# EAGLE board RC2014 Led Monitor using TIL311 (EAGLE 7.1.0)
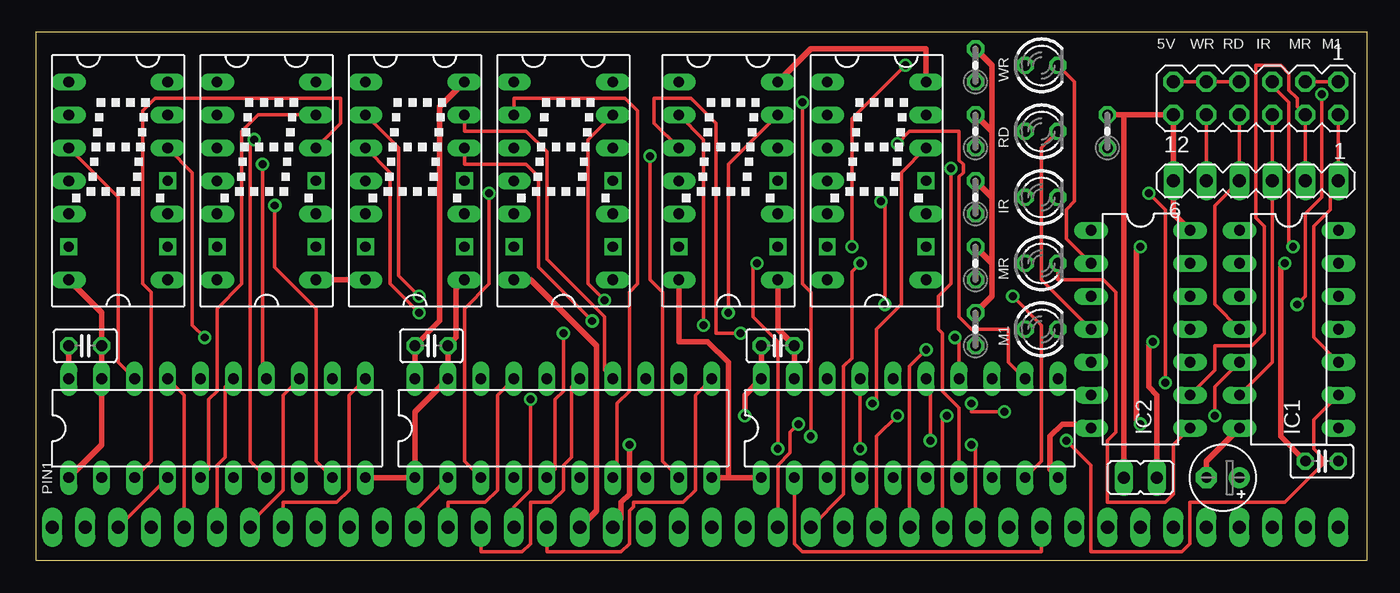
[diagram p0: board, top side]
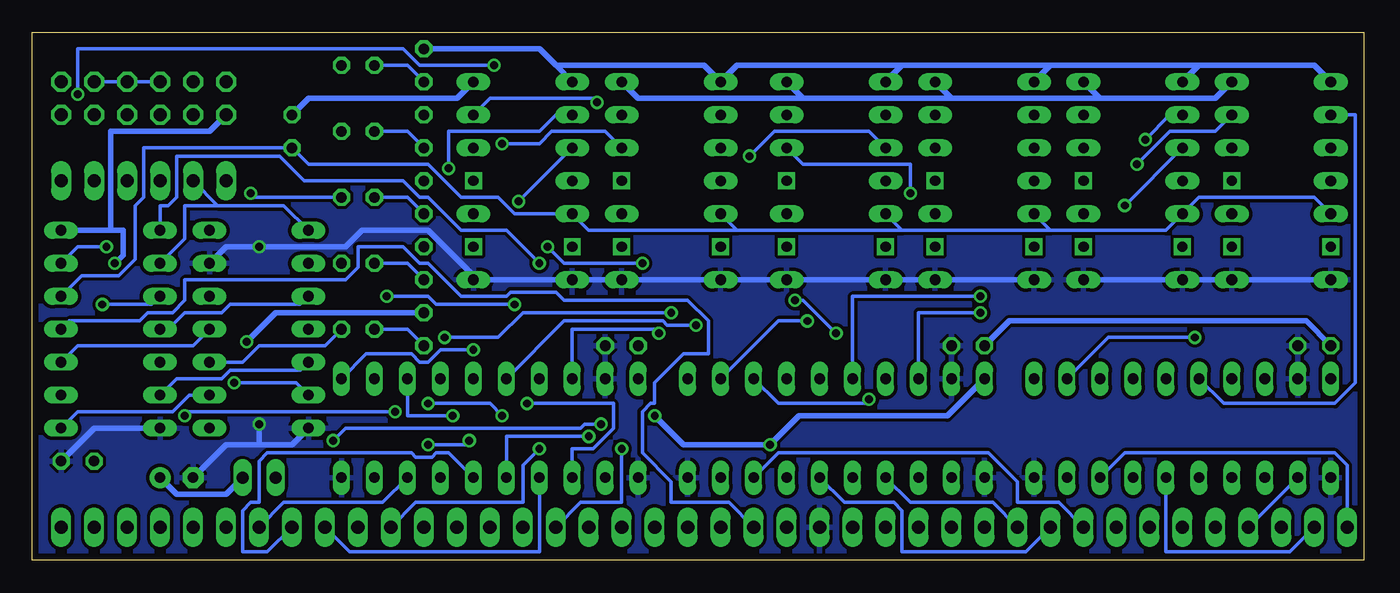
[diagram p1: board, bottom side, seen from below]

Size 102.54 x 40.63 mm. Coordinates in mm from the lower left corner, seen from the top.
Outline: 0,0 102.54,0 102.54,40.63 0,40.63 0,0
Copper layers (1*16): Top 0.035mm / dielectric 1.5mm / Bottom 0.035mm
Design rules "default *": minimum track width 10mil, minimum drill 24mil, track to track 10mil, track to pad 10mil, pad to pad 10mil, via to via 10mil, smd to smd 8mil, copper to edge 20mil, drill to drill 8mil, minimum pad ring 10mil, minimum via ring 8mil, stop-mask expansion 4mil, vias tented up to drill 25mil, thermal gap 10mil
Net classes: 1 PWR: width 0.406 mm

## Footprints (pad centres in the part's own frame; a part is rotated, then mirrored left to right if it is on the bottom)
C025-025X050 = drill 0.813 octagon: 1 -1.27,0; 2 1.27,0
E2,5-5 = drill 0.813 pad 1.6: + -1.27,0 | drill 0.813 pad 1.6 octagon: - 1.27,0
HTIL311A_EXTRAPADS = drill 0.813 long: 1 -3.81,7.62; 2 -3.81,5.08; 3 -3.81,2.54; 4 -3.81,0; 5 -3.81,-2.54; 7 -3.81,-7.62; 8 3.81,-7.62; 10 3.81,-2.54; 12 3.81,2.54; 13 3.81,5.08; 14 3.81,7.62 | drill 0.8 square: UNUSED1 3.81,0; UNUSED2 -3.81,-5.08; UNUSED3 3.81,-5.08
DIL14 = drill 0.813 long: 1 -7.62,-3.81; 2 -5.08,-3.81; 3 -2.54,-3.81; 4 0,-3.81; 5 2.54,-3.81; 6 5.08,-3.81; 7 7.62,-3.81; 8 7.62,3.81; 9 5.08,3.81; 10 2.54,3.81; 11 0,3.81; 12 -2.54,3.81; 13 -5.08,3.81; 14 -7.62,3.81
DIL20 = drill 0.813 long: 1 -11.43,-3.81; 2 -8.89,-3.81; 3 -6.35,-3.81; 4 -3.81,-3.81; 5 -1.27,-3.81; 6 1.27,-3.81; 7 3.81,-3.81; 8 6.35,-3.81; 9 8.89,-3.81; 10 11.43,-3.81; 11 11.43,3.81; 12 8.89,3.81; 13 6.35,3.81; 14 3.81,3.81; 15 1.27,3.81; 16 -1.27,3.81; 17 -3.81,3.81; 18 -6.35,3.81; 19 -8.89,3.81; 20 -11.43,3.81
JP1 = drill 0.914 long: 1 0,-1.27; 2 0,1.27
LED3MM = drill 0.813 octagon: A -1.27,0; K 1.27,0
0204V = drill 0.813 octagon: 1 -1.27,0; 2 1.27,0
MA06-2 = drill 1.016 octagon: 1 -6.35,-1.27; 2 -6.35,1.27; 3 -3.81,-1.27; 4 -3.81,1.27; 5 -1.27,-1.27; 6 -1.27,1.27; 7 1.27,-1.27; 8 1.27,1.27; 9 3.81,-1.27; 10 3.81,1.27; 11 6.35,-1.27; 12 6.35,1.27
MA06-1 = drill 1.016 long: 1 -6.35,0; 2 -3.81,0; 3 -1.27,0; 4 1.27,0; 5 3.81,0; 6 6.35,0
SIP40 = drill 1.016 long: 1 -48.26,0; 2 -45.72,0; 3 -43.18,0; 4 -40.64,0; 5 -38.1,0; 6 -35.56,0; 7 -33.02,0; 8 -30.48,0; 9 -27.94,0; 10 -25.4,0; 11 -22.86,0; 12 -20.32,0; 13 -17.78,0; 14 -15.24,0; 15 -12.7,0; 16 -10.16,0; 17 -7.62,0; 18 -5.08,0; 19 -2.54,0; 20 0,0; 21 2.54,0; 22 5.08,0; 23 7.62,0; 24 10.16,0; 25 12.7,0; 26 15.24,0; 27 17.78,0; 28 20.32,0; 29 22.86,0; 30 25.4,0; 31 27.94,0; 32 30.48,0; 33 33.02,0; 34 35.56,0; 35 38.1,0; 36 40.64,0; 37 43.18,0; 38 45.72,0; 39 48.26,0; 40 50.8,0

## Placement (x,y rotation side)
C1  [C025-025X050]  30.48,16.51 0 top
C3  [C025-025X050]  57.15,16.51 0 top
C5  [C025-025X050]  99.06,7.62 0 top
C7  [C025-025X050]  3.81,16.51 0 top
C8  [E2,5-5]  91.44,6.35 180 top
DIS1  HTIL311A_EXTRAPADS  [HTIL311A_EXTRAPADS]  6.35,29.21 0 top
DIS2  HTIL311A_EXTRAPADS  [HTIL311A_EXTRAPADS]  17.78,29.21 0 top
DIS3  HTIL311A_EXTRAPADS  [HTIL311A_EXTRAPADS]  29.21,29.21 0 top
DIS4  HTIL311A_EXTRAPADS  [HTIL311A_EXTRAPADS]  40.64,29.21 0 top
DIS5  HTIL311A_EXTRAPADS  [HTIL311A_EXTRAPADS]  53.34,29.21 0 top
DIS6  HTIL311A_EXTRAPADS  [HTIL311A_EXTRAPADS]  64.77,29.21 0 top
IC1  74HCT04N  [DIL14]  96.52,17.78 270 top
IC2  74LS05N  [DIL14]  85.09,17.78 270 top
IC6  74HCT244N  [DIL20]  13.97,10.16 0 top
IC7  74HCT244N  [DIL20]  40.64,10.16 0 top
IC8  74HCT244N  [DIL20]  67.31,10.16 0 top
JP1  [JP1]  85.09,6.35 270 top
LED1  [LED3MM]  77.47,38.1 0 top
LED2  [LED3MM]  77.47,33.02 0 top
LED3  [LED3MM]  77.47,27.94 0 top
LED4  [LED3MM]  77.47,22.86 0 top
LED5  [LED3MM]  77.47,17.78 0 top
R1  [0204V]  72.39,38.1 90 top
R2  [0204V]  72.39,33.02 90 top
R3  [0204V]  72.39,27.94 90 top
R4  [0204V]  72.39,22.86 90 top
R5  [0204V]  72.39,17.78 90 top
R6  [0204V]  82.55,33.02 90 top
SV1  [MA06-2]  93.98,35.56 180 top
SV2  [MA06-1]  93.98,29.21 180 top
U$1  RC2014  [SIP40]  49.53,2.54 0 top

## Library data of the parts
C1 C3 C5 C7 C8 R1-R6 = resistor
DIS1-DIS6 = scott; OC_FARNELL: unknown; OC_NEWARK: unknown
IC1 IC2 IC6-IC8 = 74xx-eu
JP1 = jumper
LED1-LED5 = led
SV1 SV2 = con-lstb; OC_FARNELL: unknown; OC_NEWARK: unknown
U$1 = scott

## Nets
+5V [PWR]: C1.1 C3.1 C5.1 C7.1 DIS1.14 DIS2.14 DIS3.14 DIS4.14 DIS5.14 DIS6.14 IC1.14 IC2.14 IC6.20 IC7.20 IC8.20 JP1.1 R6.2 SV1.12 SV2.6 U$1.18
A0: IC7.11 U$1.16
A1: IC7.13 U$1.15
A2: IC7.15 U$1.14
A3: IC7.17 U$1.13
A4: IC7.2 U$1.12
A5: IC7.4 U$1.11
A6: IC7.6 U$1.10
A7: IC7.8 U$1.9
A8: IC6.11 U$1.8
A9: IC6.13 U$1.7
A10: IC6.15 U$1.6
A11: IC6.17 U$1.5
A12: IC6.2 U$1.4
A13: IC6.4 U$1.3
A14: IC6.6 U$1.2
A15: IC6.8 U$1.1
D0: IC8.11 U$1.27
D1: IC8.13 U$1.28
D2: IC8.15 U$1.29
D3: IC8.17 U$1.30
D4: IC8.2 U$1.31
D5: IC8.4 U$1.32
D6: IC8.6 U$1.33
D7: IC8.8 U$1.34
GND [PWR]: C1.2 C3.2 C5.2 C7.2 C8.- DIS1.7 DIS1.8 DIS2.7 DIS2.8 DIS3.7 DIS3.8 DIS4.7 DIS4.8 DIS5.7 DIS5.8 DIS6.7 DIS6.8 IC1.7 IC2.7 IC2.13 IC6.1 IC6.10 IC6.19 IC7.1 IC7.10 IC7.19 IC8.1 IC8.10 IC8.19 U$1.17
IORQ: IC1.5 U$1.26
IORQ_INV: IC1.6 IC2.5 SV1.6 SV2.3
IORQ_LED: IC2.6 LED3.K
LATCH: DIS1.5 DIS2.5 DIS3.5 DIS4.5 DIS5.5 DIS6.5 IC1.12 R6.1
M1: IC1.11 U$1.19
M1_INV: IC1.10 IC2.11 SV1.2 SV2.1
M1_LED: IC2.10 LED5.K
MREQ: IC1.9 U$1.23
MREQ_INV: IC1.8 IC2.9 SV1.4 SV2.2
MREQ_LED: IC2.8 LED4.K
N$1: DIS1.3 IC6.18
N$2 [PWR]: C8.+ DIS1.1 DIS2.1 DIS3.1 DIS4.1 DIS5.1 DIS6.1 JP1.2 R1.2 R2.2 R3.2 R4.2 R5.2
N$3: LED1.A R1.1
N$4: LED2.A R2.1
N$5: LED3.A R3.1
N$6: LED4.A R4.1
N$7: LED5.A R5.1
N$8: DIS1.2 IC6.16
N$9: DIS1.13 IC6.14
N$10: DIS1.12 IC6.12
N$11: DIS2.3 IC6.9
N$12: DIS2.2 IC6.7
N$13: DIS2.13 IC6.5
N$14: DIS2.12 IC6.3
N$15: DIS3.3 IC7.18
N$16: DIS3.2 IC7.16
N$17: DIS3.13 IC7.14
N$18: DIS3.12 IC7.12
N$19: DIS4.3 IC7.9
N$20: DIS4.2 IC7.7
N$21: DIS4.13 IC7.5
N$22: DIS4.12 IC7.3
N$23: DIS5.3 IC8.18
N$24: DIS5.2 IC8.16
N$25: DIS5.13 IC8.14
N$26: DIS5.12 IC8.12
N$27: DIS6.3 IC8.9
N$28: DIS6.2 IC8.7
N$29: DIS6.13 IC8.5
N$30: DIS6.12 IC8.3
N$79: IC1.13 SV1.1 SV1.3 SV1.5 SV1.7 SV1.9 SV1.11
RD: IC1.3 U$1.25
RD_INV: IC1.4 IC2.3 SV1.8 SV2.4
RD_LED: IC2.4 LED2.K
WR: IC1.1 U$1.24
WR_INV: IC1.2 IC2.1 SV1.10 SV2.5
WR_LED: IC2.2 LED1.K

## Tracks (layer width: path | path; a pad name or v marks a point on that pad's centre or on a via)
+5V  (via drill 0.61)
  Top 0.406: C3.1 IC8.20 54.61,12.7 v54.61,11.11 | C7.1 IC6.20 | IC7.20 C1.1 31.11,18.41 31.11,34.92 DIS3.14 | U$1.18 45.09,3.17 45.09,4.45 45.72,5.08 v45.72,8.89 | C5.1 95.89,9.53 95.89,22.54 v96.2,22.86 | IC2.14 87.63,26.67 SV2.6 SV1.12 83.82,34.29 | 83.82,34.29 R6.2 | 83.82,34.29 JP1.1 | DIS5.14 59.69,39.37 68.58,39.37 DIS6.14
  Bottom 0.406: IC7.20 32.07,11.11 43.5,11.11 v45.72,8.89 52.39,8.89 v54.61,11.11 | C7.1 4.45,18.41 27.3,18.41 C1.1 | DIS1.14 11.43,35.56 20.32,35.56 | DIS2.14 20.32,35.56 | 31.75,35.56 DIS3.14 | 20.32,35.56 31.75,35.56 | 43.18,35.56 DIS4.14 | 31.75,35.56 43.18,35.56 | DIS5.14 55.88,35.56 43.18,35.56 | v96.2,22.86 95.57,23.5 95.57,25.4 96.52,25.4 | IC1.14 96.52,25.4 | DIS6.14 69.85,35.56 81.28,35.56 R6.2 | 96.52,25.4 96.52,33.02 88.9,33.02 SV1.12
A0
  Top 0.254: IC7.11 50.8,12.7 50.8,5.4 49.85,4.45 46.04,4.45 46.04,4.13 45.72,3.81 45.72,1.27 45.09,0.64 39.37,0.64 U$1.16
A1  (via drill 0.61)
  Top 0.254: v38.1,12.38 38.1,5.4 36.83,4.13 U$1.15
  Bottom 0.254: IC7.13 45.09,12.06 38.42,12.06 v38.1,12.38
A2
  Top 0.254: IC7.15 41.27,13.34 41.27,7.94 40.64,7.3 40.64,5.4 39.69,4.45 38.1,4.45 38.1,1.27 37.47,0.64 34.29,0.64 U$1.14
A3
  Top 0.254: IC7.17 35.56,12.7 35.56,5.4 34.61,4.45 31.75,4.45 U$1.13
A4
  Top 0.254: IC7.2 29.21,3.81 U$1.12
A5
  Bottom 0.254: IC7.4 34.92,4.45 28.57,4.45 U$1.11
A6
  Bottom 0.254: IC7.6 40.01,4.45 36.2,4.45 35.56,3.81 35.56,0.64 26.04,0.64 U$1.10
A7
  Bottom 0.254: IC7.8 45.09,8.26 28.89,8.26 26.67,6.03 26.67,4.45 23.5,4.45 U$1.9
A8
  Top 0.254: IC6.11 24.13,12.7 24.13,5.4 23.18,4.45 19.05,4.45 U$1.8
A9
  Top 0.254: IC6.13 19.05,12.7 19.05,5.4 16.51,2.86 U$1.7
A10
  Top 0.254: IC6.15 14.61,13.34 14.61,7.94 13.97,7.3 U$1.6
A11
  Top 0.254: IC6.17 11.43,12.7 U$1.5
A12
  Bottom 0.254: U$1.4 IC6.2
A13
  Top 0.254: U$1.3 IC6.4
A14
  Bottom 0.254: IC6.6 15.24,0.64 5.71,0.64 U$1.2
A15
  Bottom 0.254: IC6.8 18.41,8.26 2.22,8.26 1.27,7.3 U$1.1
D0  (via drill 0.61)
  Top 0.254: v68.58,16.19 67.31,14.92 U$1.27
  Bottom 0.254: IC8.11 76.83,15.88 73.34,15.88 72.71,15.24 72.07,15.24 71.12,16.19 v68.58,16.19
D1  (via drill 0.61)
  Top 0.254: v70.17,11.11 69.85,10.79 U$1.28
  Bottom 0.254: IC8.13 73.66,11.11 v70.17,11.11
D2  (via drill 0.61)
  Top 0.254: IC8.15 68.9,13.65 v68.9,9.21 | v72.07,8.89 72.39,8.57 U$1.29
  Bottom 0.254: v68.9,9.21 69.22,8.89 v72.07,8.89
D3  (via drill 0.61)
  Top 0.254: v63.5,8.57 IC8.17
  Bottom 0.254: v63.5,8.57 64.77,7.3 64.77,4.45 73.03,4.45 U$1.30
D4
  Top 0.254: IC8.2 58.42,1.27 59.05,0.64 77.47,0.64 U$1.31
D5
  Bottom 0.254: IC8.4 63.5,0.64 78.11,0.64 U$1.32
D6
  Bottom 0.254: IC8.6 70.48,8.26 71.44,8.26 71.75,7.94 73.03,7.94 73.34,8.26 84.45,8.26 85.09,7.62 85.09,4.45 85.72,4.45 86.36,3.81 86.36,0.64 84.45,0.64 U$1.33
D7
  Bottom 0.254: IC8.8 75.56,4.45 83.19,4.45 U$1.34
GND  (via drill 0.61)
  Top 0.406: IC8.10 78.11,6.99 78.11,9.53 79.06,10.48 81.28,10.48 IC2.7 | IC1.7 90.17,7.62 C8.- | IC8.19 C3.2 57.15,17.78 DIS5.8 | v85.09,10.48 84.77,10.79 84.77,23.81 v85.09,24.13 | DIS3.7 DIS2.8 | IC6.1 5.08,8.89 IC6.19 C7.2 5.08,19.05 DIS1.7 | IC8.1 53.34,6.35 | 53.34,6.35 IC7.10 | 53.34,6.35 53.34,15.24 51.75,16.83 49.53,16.83 DIS5.7 | IC6.10 IC7.1 29.21,11.43 IC7.19 C1.2 32.38,17.14 32.38,20.95 DIS3.8 | U$1.17 43.18,3.81 43.18,16.51 38.1,21.59 DIS4.7
  Bottom 0.406: C5.2 97.79,10.16 IC1.7 | IC2.7 82.55,8.89 85.09,8.89 | 85.09,8.89 87.63,8.89 C8.- | 68.26,21.59 DIS6.7 DIS5.8 DIS5.7 DIS4.8 DIS4.7 DIS3.8 DIS3.7 | IC2.13 87.63,24.13 v85.09,24.13 78.42,24.13 77.15,25.4 72.07,25.4 68.26,21.59 | 68.26,21.59 DIS6.8 | v85.09,10.48 85.09,8.89 | DIS1.7 DIS1.8 DIS2.7 DIS2.8
  pour Bottom: 0,0 0,40.64 102.87,40.64 102.87,0
IORQ  (via drill 0.61)
  Top 0.254: IC1.5 90.81,13.34 v90.81,11.11 | v74.61,11.43 72.07,11.43 v72.07,12.06 | v66.36,11.11 64.77,9.53 U$1.26
  Bottom 0.254: v90.81,11.11 90.49,11.43 v74.61,11.43 | v72.07,12.06 67.31,12.06 v66.36,11.11
IORQ_INV
  Top 0.254: SV1.6 SV2.3 95.25,15.24 IC1.6
  Bottom 0.254: IC2.5 81.92,14.61 87.31,14.61 87.95,13.97 91.44,13.97 IC1.6
IORQ_LED  (via drill 0.61)
  Top 0.254: v87,13.65 87,26.99 v85.72,28.26
  Bottom 0.254: IC2.6 82.23,13.65 v87,13.65 | v85.72,28.26 85.41,27.94 LED3.K
LATCH
  Bottom 0.254: DIS1.5 3.81,27.94 12.7,27.94 DIS2.5 15.24,25.4 24.13,25.4 | 24.13,25.4 DIS3.5 | 35.56,25.4 DIS4.5 | 24.13,25.4 35.56,25.4 | 48.26,25.4 DIS5.5 | 35.56,25.4 48.26,25.4 | 48.26,25.4 59.69,25.4 DIS6.5 65.41,26.67 66.67,27.94 69.53,27.94 72.07,30.48 81.28,30.48 R6.1 93.98,31.75 93.98,27.94 94.61,27.3 94.61,23.18 95.89,21.91 98.74,21.91 IC1.12
M1
  Bottom 0.254: IC1.11 99.69,18.41 94.3,18.41 93.66,19.05 91.76,19.05 90.81,20 90.81,21.59 78.42,21.59 77.47,22.54 77.47,24.13 73.98,24.13 72.71,22.86 72.07,22.86 69.53,20.32 66.04,20.32 65.72,20.64 62.23,20.64 61.59,20 52.07,20 50.48,18.41 50.48,15.88 52.39,15.88 54.61,13.65 54.61,12.06 54.93,12.06 55.56,11.43 55.56,8.26 53.34,6.03 53.34,4.45 48.9,4.45 U$1.19
M1_INV
  Top 0.254: SV1.2 SV2.1 99.69,28.57 99.69,26.99 98.42,25.72 98.42,17.14 IC1.10
  Bottom 0.254: IC2.11 90.17,16.51 99.06,16.51 IC1.10
M1_LED
  Bottom 0.254: LED5.K 80.01,16.51 85.09,16.51 86.36,15.24 IC2.10
MREQ  (via drill 0.61)
  Top 0.254: IC1.9 98.42,10.79 98.42,8.57 99.06,7.94 99.06,7.3 96.2,4.45 88.9,4.45 88.9,1.27 88.27,0.64 81.28,0.64 81.28,7.3 v79.38,9.21 | v58.74,10.48 58.1,9.84 58.1,8.26 57.15,7.3 U$1.23
  Bottom 0.254: v79.38,9.21 78.42,10.16 60.33,10.16 60.01,10.48 v58.74,10.48
MREQ_INV
  Top 0.254: SV2.2 SV1.4 97.16,34.92 97.16,35.56 96.52,36.2 96.52,37.47 95.89,38.1 93.98,38.1 93.98,26.35 94.61,25.72 94.61,17.46 93.66,16.51 90.81,16.51 90.81,14.61 IC2.9
  Bottom 0.254: IC1.8 99.06,11.43 91.76,11.43 90.49,12.7 IC2.9
MREQ_LED
  Top 0.254: IC2.8 87.63,8.89 87.63,5.08 87,4.45 82.55,4.45 82.55,9.21 83.19,9.84 83.19,20.64 82.23,21.59 78.74,21.59 LED4.K
N$1
  Top 0.254: IC6.18 6.35,15.24 6.35,27.94 DIS1.3
N$2  (via drill 0.61)
  Top 0.406: R5.2 73.66,20.32 73.66,22.86 | R4.2 73.66,22.86 | 73.66,27.94 R3.2 | 73.66,22.86 73.66,27.94 | 73.66,33.02 R2.2 | 73.66,27.94 73.66,33.02 | JP1.2 86.36,12.7 85.72,13.34 85.72,16.51 v86.04,16.83 | R1.2 73.66,38.1 73.66,33.02
  Bottom 0.406: DIS1.1 3.81,38.1 12.7,38.1 | DIS2.1 12.7,38.1 | 24.13,38.1 DIS3.1 | 12.7,38.1 24.13,38.1 | 35.56,38.1 DIS4.1 | 24.13,38.1 35.56,38.1 | 35.56,38.1 48.26,38.1 DIS5.1 50.8,38.1 62.23,38.1 | 62.23,38.1 63.5,39.37 R1.2 | 62.23,38.1 DIS6.1 | JP1.2 87.63,5.08 91.44,5.08 C8.+ | v86.04,16.83 83.82,19.05 R5.2
N$3
  Bottom 0.254: R1.1 73.66,38.1 LED1.A
N$4
  Bottom 0.254: R2.1 73.66,33.02 LED2.A
N$5
  Bottom 0.254: R3.1 73.66,27.94 LED3.A
N$6
  Bottom 0.254: R4.1 73.66,22.86 LED4.A
N$7
  Bottom 0.254: R5.1 73.66,17.78 LED5.A
N$8
  Bottom 0.254: IC6.16 10.79,12.06 2.22,12.06 0.64,13.65 0.64,34.29 DIS1.2
N$9  (via drill 0.61)
  Top 0.254: IC6.14 17.46,14.29 v17.46,30.48
  Bottom 0.254: v17.46,30.48 14.92,33.02 11.43,33.02 DIS1.13
N$10  (via drill 0.61)
  Top 0.254: v13.02,17.14 12.06,18.1 12.06,29.84 DIS1.12
  Bottom 0.254: IC6.12 19.68,17.14 v13.02,17.14
N$11  (via drill 0.61)
  Top 0.254: IC6.9 21.59,7.62 21.59,19.37 18.41,22.54 v18.41,27.3
  Bottom 0.254: DIS2.3 v18.41,27.3
N$12  (via drill 0.61)
  Top 0.254: IC6.7 16.51,7.62 16.51,32.07 v16.83,32.38
  Bottom 0.254: v16.83,32.38 14.92,34.29 DIS2.2
N$13
  Top 0.254: IC6.5 13.34,6.99 13.34,12.38 13.97,13.02 13.97,19.37 15.88,21.27 15.88,33.02 17.14,34.29 DIS2.13
N$14
  Top 0.254: IC6.3 8.89,7.62 8.89,20.64 8.26,21.27 8.26,34.61 9.21,35.56 23.5,35.56 23.5,33.66 DIS2.12
N$15  (via drill 0.61)
  Top 0.254: v29.53,19.05 27.3,21.27 27.3,29.84 DIS3.3
  Bottom 0.254: IC7.18 34.29,19.05 v29.53,19.05
N$16  (via drill 0.61)
  Top 0.254: v29.53,20.32 27.94,21.91 27.94,31.75 DIS3.2
  Bottom 0.254: IC7.16 39.37,20.32 v29.53,20.32
N$17
  Top 0.254: IC7.14 43.81,14.61 43.81,18.73 39.37,23.18 39.37,31.43 37.78,33.02 33.02,33.02 DIS3.13
N$18  (via drill 0.61)
  Top 0.254: v42.86,18.41 38.73,22.54 38.73,29.53 37.78,30.48 33.02,30.48 DIS3.12
  Bottom 0.254: IC7.12 45.09,18.41 v42.86,18.41
N$19  (via drill 0.61)
  Top 0.254: IC7.9 48.26,7.62 48.26,20.64 47.31,21.59 v47.31,31.11
  Bottom 0.254: v47.31,31.11 45.4,33.02 38.1,33.02 DIS4.3
N$20
  Top 0.254: IC7.7 44.77,6.67 44.77,12.06 45.72,13.02 45.72,20.64 46.35,21.27 46.35,34.61 45.4,35.56 36.83,35.56 DIS4.2
N$21  (via drill 0.61)
  Top 0.254: IC7.5 40.01,6.99 40.01,12.38 40.64,13.02 v40.64,17.46 | v43.81,20 42.55,21.27 42.55,32.38 DIS4.13
  Bottom 0.254: v40.64,17.46 43.18,20 v43.81,20
N$22  (via drill 0.61)
  Top 0.254: IC7.3 33.02,7.62 33.02,19.37 34.92,21.27 v34.92,28.26
  Bottom 0.254: v34.92,28.26 34.92,30.48 43.18,30.48 DIS4.12
N$23  (via drill 0.61)
  Top 0.254: v54.29,17.46 52.39,17.46 52.39,33.66 50.48,35.56 47.62,35.56 47.62,33.66 DIS5.3
  Bottom 0.254: IC8.18 60.96,17.78 54.61,17.78 v54.29,17.46
N$24  (via drill 0.61)
  Top 0.254: v51.44,18.1 51.44,32.38 DIS5.2
  Bottom 0.254: IC8.16 61.59,18.41 53.98,18.41 53.66,18.1 v51.44,18.1
N$25  (via drill 0.61)
  Top 0.254: DIS5.13 53.34,30.48 v53.34,19.05 | v70.8,17.14 71.12,16.83 IC8.14
  Bottom 0.254: v53.34,19.05 64.77,19.05 66.67,17.14 v70.8,17.14
N$26  (via drill 0.61)
  Top 0.254: v66.36,32.07 67.31,33.02 71.12,33.02 71.12,30.8 71.44,30.48 71.44,29.84 71.12,29.53 71.12,18.73 72.07,17.78 74.93,17.78 74.93,15.24 IC8.12
  Bottom 0.254: DIS5.12 58.42,33.02 62.55,33.02 63.5,32.07 v66.36,32.07
N$27  (via drill 0.61)
  Top 0.254: v65.09,27.62 65.41,27.3 v65.41,19.68 | v75.25,20.32 77.47,18.1 77.47,7.62 IC8.9
  Bottom 0.254: v65.09,27.62 DIS6.3 | v65.41,19.68 71.44,19.68 72.07,20.32 v75.25,20.32
N$28  (via drill 0.61)
  Top 0.254: IC8.7 71.12,11.75 69.85,13.02 69.85,17.46 69.53,17.78 69.53,20.32 70.48,21.27 v70.48,30.16
  Bottom 0.254: v70.48,30.16 70.48,33.02 63.5,33.02 62.23,34.29 DIS6.2
N$29  (via drill 0.61)
  Top 0.254: v59.69,9.53 59.69,20.64 59.05,21.27 v59.05,35.24
  Bottom 0.254: IC8.5 66.04,9.53 v59.69,9.53 | v59.05,35.24 59.37,35.56 67.31,35.56 DIS6.13
N$30  (via drill 0.61)
  Top 0.254: v64.45,12.06 64.77,12.38 64.77,17.78 66.67,19.68 66.67,29.84 DIS6.12
  Bottom 0.254: IC8.3 60.96,8.57 59.37,8.57 57.78,10.16 57.78,12.06 v64.45,12.06
N$79  (via drill 0.61)
  Top 0.254: SV1.11 SV1.9 SV1.7 | SV1.1 SV1.3 | v96.84,24.13 96.52,24.45 96.52,35.24 95.25,36.51 SV1.5
  Bottom 0.254: IC1.13 99.06,24.13 v96.84,24.13 | SV1.3 SV1.5 SV1.7
RD  (via drill 0.61)
  Top 0.254: v97.16,19.68 97.79,20.32 97.79,26.67 99.06,27.94 v99.06,35.88 | v66.99,38.1 62.87,33.97 v62.87,24.13 | v55.56,22.86 55.24,22.54 55.24,18.73 57.15,16.83 v57.15,8.57
  Bottom 0.254: IC1.3 93.34,19.68 v97.16,19.68 | v99.06,35.88 99.06,39.37 73.98,39.37 72.71,38.1 v66.99,38.1 | v62.87,24.13 61.59,22.86 v55.56,22.86 | v57.15,8.57 57.15,4.45 60.33,4.45 U$1.25
RD_INV
  Top 0.254: SV1.8 SV2.4 90.81,27.3 90.81,19.68 IC1.4
  Bottom 0.254: IC2.3 81.92,19.68 87.31,19.68 87.95,19.05 90.81,19.05 92.08,17.78 IC1.4
RD_LED
  Top 0.254: IC2.4 77.47,21.59 77.47,31.75 LED2.K
WR  (via drill 0.61)
  Top 0.254: v63.5,22.86 62.87,22.23 62.87,15.56 62.23,14.92 62.23,5.08 U$1.24
  Bottom 0.254: IC1.1 92.71,27.3 92.08,27.3 91.44,27.94 91.44,31.11 83.5,31.11 81.6,29.21 73.98,29.21 72.71,27.94 72.07,27.94 69.53,25.4 66.04,25.4 v63.5,22.86
WR_INV
  Top 0.254: SV2.5 SV1.10
  Bottom 0.254: IC2.1 83.19,27.3 88.27,27.3 | SV2.5 88.27,27.3 | IC1.2 90.81,24.77 90.81,27.3 88.27,27.3
WR_LED
  Top 0.254: IC2.2 79.38,24.77 79.38,26.99 80.01,27.62 80.01,36.83 LED1.K

## Text on the board
tPlace: 5V | WR | RD | IR | MR | M1 | WR | RD | IR | MR | M1 | PIN1